# EAGLE board shd_v2.1_double 2 (EAGLE 9.5.2)
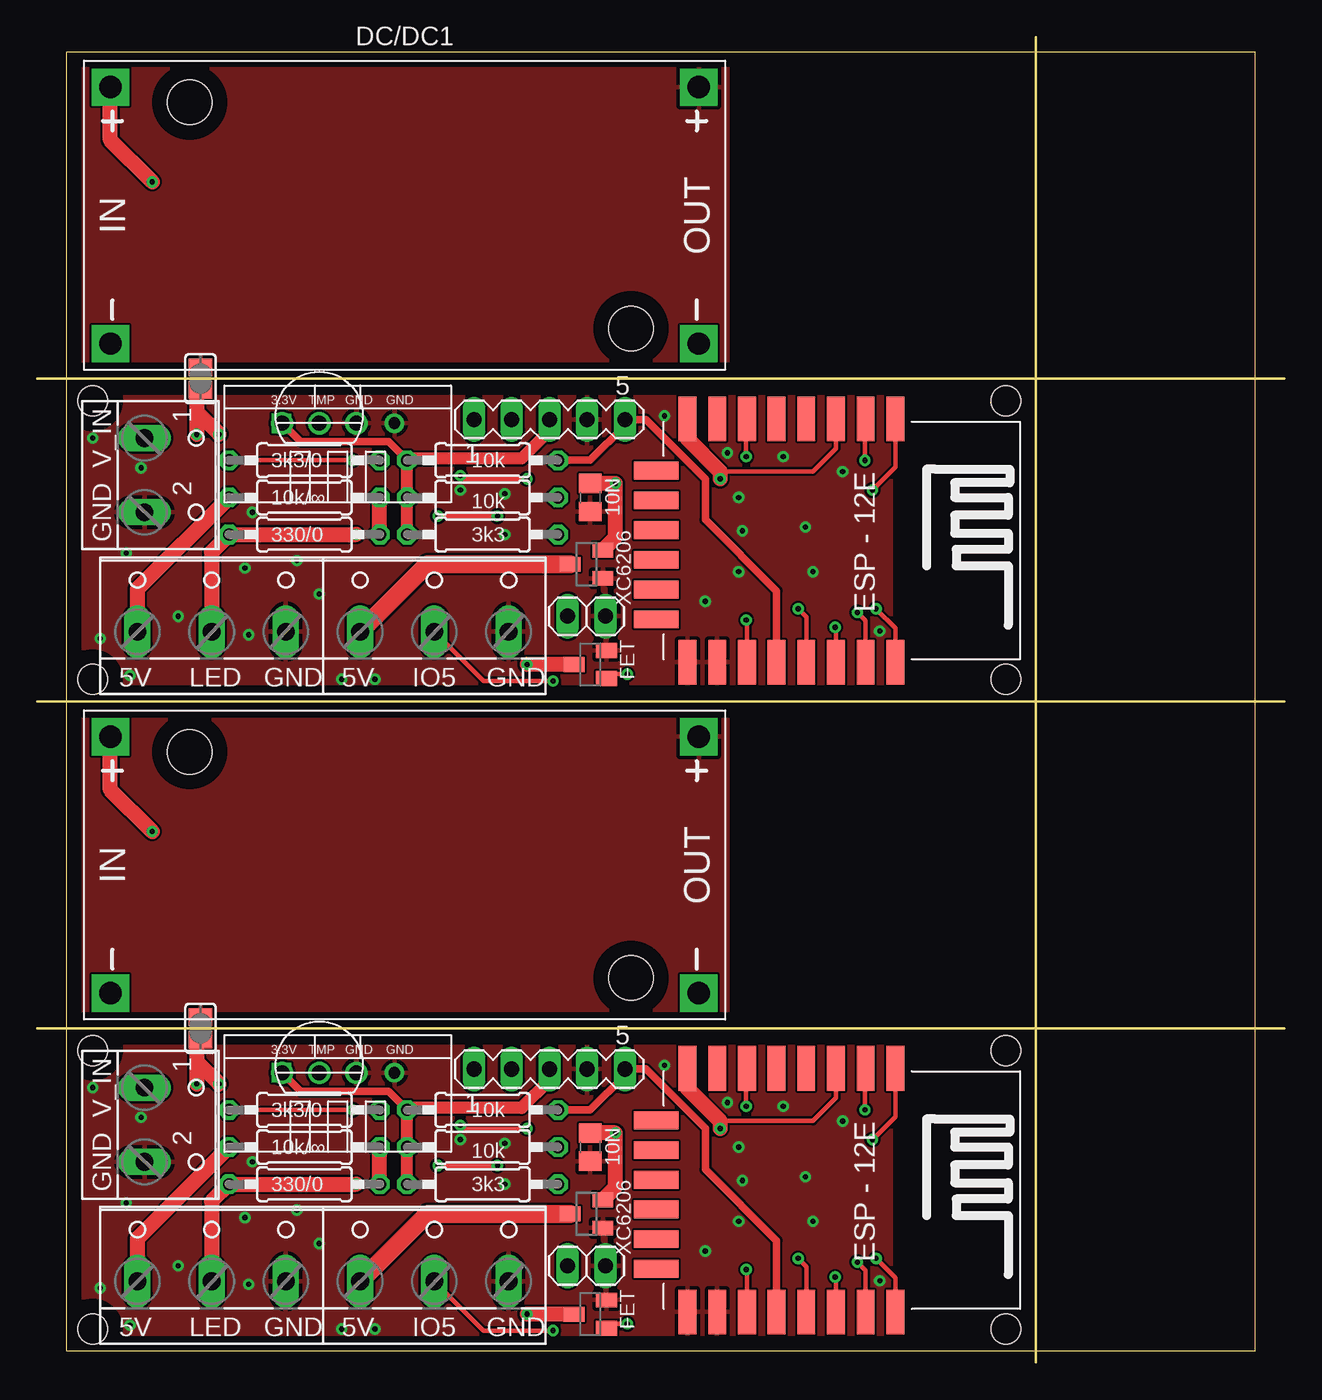
[diagram p0: board, top side]
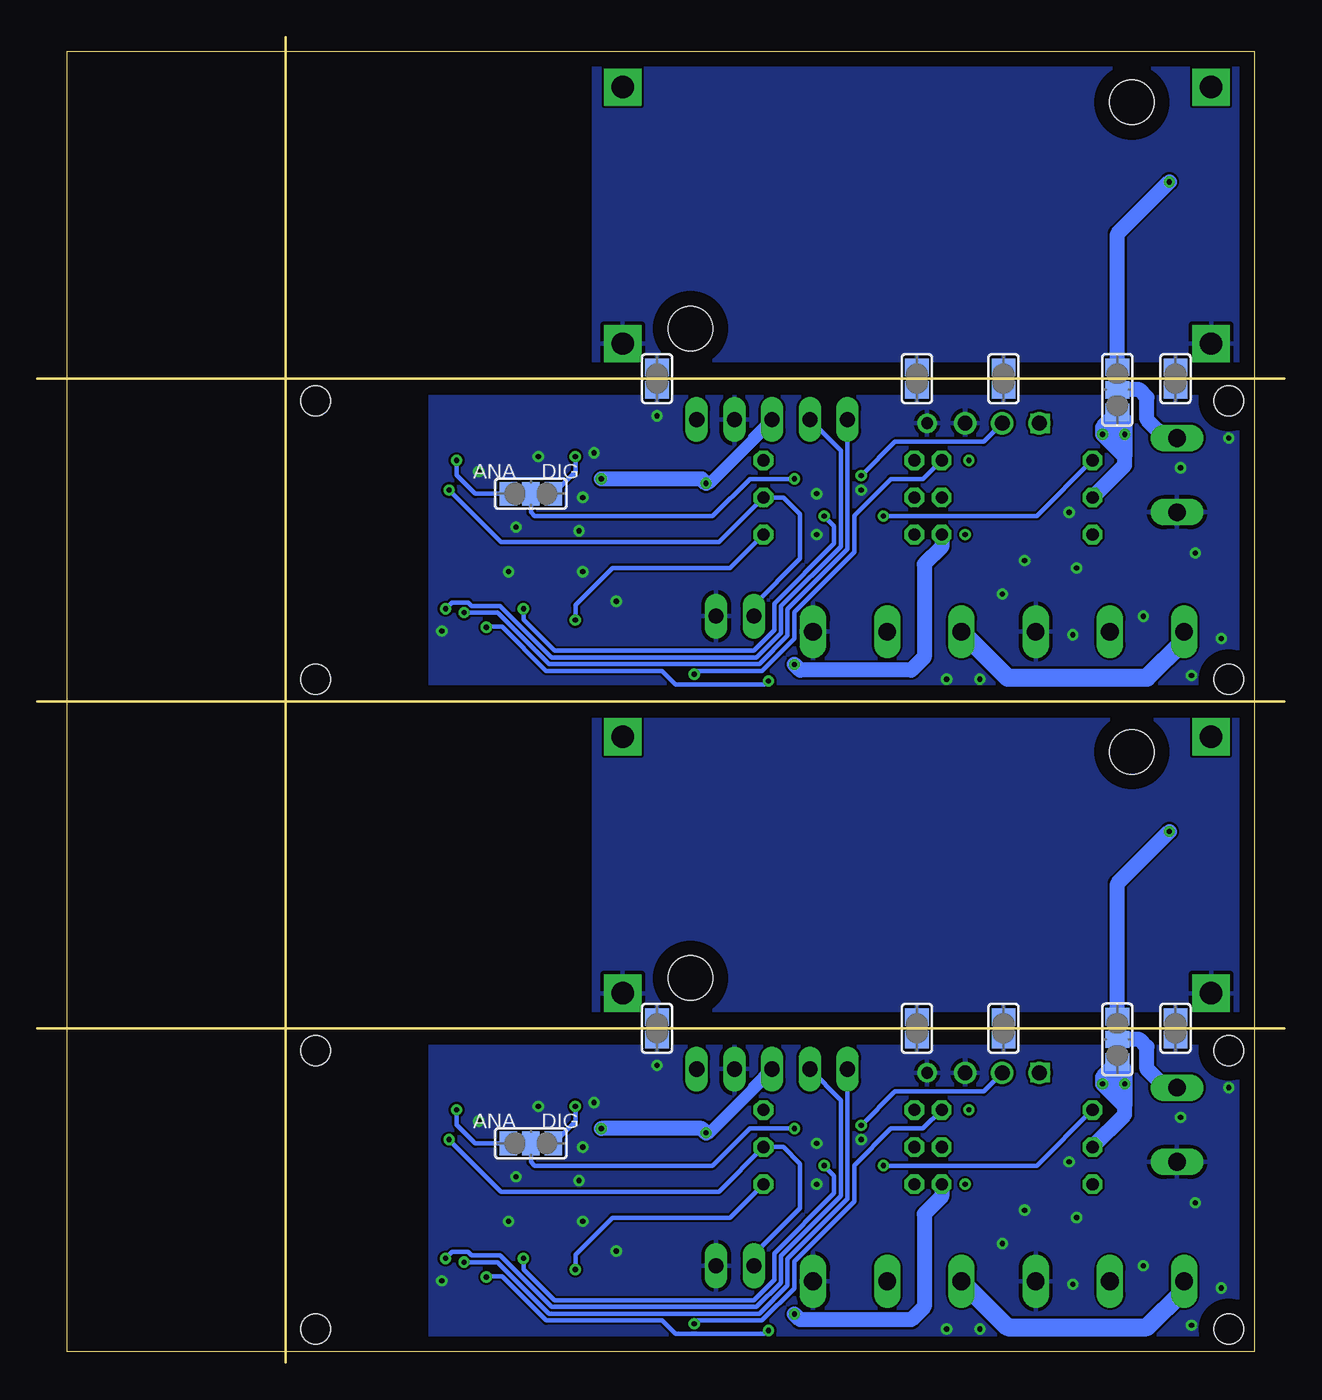
[diagram p1: board, bottom side, seen from below]

Size 84 x 89.25 mm. Coordinates in mm from the lower left corner, seen from the top.
Outline: 2,44.5 67.25,44.5
Outline: 0,66.25 84,66.25
Outline: 67.25,0 67.25,89.25
Outline: 0,44.5 84,44.5
Outline: 0,22.5 84,22.5
Outline: 2,0.75 2,88.25 82,88.25 82,0.75 2,0.75
Copper layers (1*16): Top 0.035mm / dielectric 1.5mm / Bottom 0.035mm
Design rules "default *": minimum track width 0.3mm, minimum drill 0.35mm, track to track 6mil, track to pad 6mil, pad to pad 6mil, via to via 6mil, smd to smd 6mil, copper to edge 40mil, drill to drill 6mil, minimum pad ring 10mil, minimum via ring 8mil, stop-mask expansion 4mil, vias tented up to drill 0mil, thermal gap 10mil
Holes 2 mm at 3.75,21 65.25,21 65.25,2.25 3.75,2.25 3.75,64.75 65.25,64.75 65.25,46 3.75,46

## Footprints (pad centres in the part's own frame; a part is rotated, then mirrored left to right if it is on the bottom)
W237-103 = drill 1.194 long: 1 -5,-1.29; 2 0,-1.29; 3 5,-1.29
C0805 = smd 1.3 x 1.5: 1 -0.95,0; 2 0.95,0
SOT23-BEC = smd 1 x 1.4: B -0.95,-1.1; C 0,1.1; E 0.95,-1.1
DC-DC-STEP-DOWN-LM2596 = drill 1.5 pad 2.5 square: IN+ -19.812,8.636; IN- -19.812,-8.636; OUT+ 19.812,8.636; OUT- 19.812,-8.636 | hole 3: -14.478,7.62; 15.24,-7.62
ESP12E-SMD = smd 3 x 1.2: ADC -8.3,3.8; CH_PD -8.3,1.8; GND 8.1,-8.2; GPIO0 8.1,-2.2; GPIO2 8.1,-4.2; GPIO4 8.1,-0.2; GPIO5 8.1,1.8; GPIO12 -8.3,-4.2; GPIO13 -8.3,-6.2; GPIO14 -8.3,-2.2; GPIO15 8.1,-6.2; GPIO16 -8.3,-0.2; RESET -8.3,5.8; RXD0 8.1,3.8; TXD0 8.1,5.8; VCC -8.3,-8.2 | smd 1.2 x 3: CS0 -4.8,-10.3; GPIO9 -0.8,-10.3; GPIO10 1.2,-10.3; MISO -2.8,-10.3; MOSI 3.2,-10.3; SCLK 5.2,-10.3
W237-102 = drill 1.194 long: 1 -2.5,-1.27; 2 2.5,-1.27
1X02 = drill 1.016 long: 1 -1.27,0; 2 1.27,0
MA05-1 = drill 1.016 long: 1 -5.08,0; 2 -2.54,0; 3 0,0; 4 2.54,0; 5 5.08,0
0207/10 = drill 0.813 octagon: 1 -5.08,0; 2 5.08,0
SJ_2 = smd 1.168 x 1.6: 1 -1.524,0; 2 0,0; 3 1.524,0
SJ = smd 1.168 x 1.6: 1 -0.762,0; 2 0.762,0
TO-92 = drill 1: 1 -2.5,0; 2 0,0; 3 2.5,0
TEMP-HUM-SENSOR-DHT22 = drill 0.8 square: 1 -3.81,0 | drill 0.8: 2 -1.27,0; 3 1.27,0; 4 3.81,0
SOT23 = smd 1 x 1.4: 1 -0.95,-1.1; 2 0.95,-1.1; 3 0,1.1

## Placement (x,y rotation side)
5V__LED__GND  [W237-103]  11.75,6.75 0 top
5V__LED__GND1  [W237-103]  11.75,50.5 0 top
5V__PIR__GND  [W237-103]  26.75,6.75 0 top
5V__PIR__GND1  [W237-103]  26.75,50.5 0 top
10N  [C0805]  37.25,14.5 270 top
10N1  [C0805]  37.25,58.25 270 top
BC1  [SOT23-BEC]  37.25,47 90 top
BC856  [SOT23-BEC]  37.25,3.25 90 top
DC/DC  DC-DC-STEP-DOWN-LM2596  [DC-DC-STEP-DOWN-LM2596]  24.75,33.5 0 top
DC/DC1  DC-DC-STEP-DOWN-LM2596  [DC-DC-STEP-DOWN-LM2596]  24.75,77.25 0 top
ESP-12E/F  [ESP12E-SMD]  52,11.5 270 top
ESP-12E/F1  [ESP12E-SMD]  52,55.25 270 top
GND__5V  [W237-102]  8.5,16 270 top
GND__5V1  [W237-102]  8.5,59.75 270 top
JP1  [1X02]  37,6.5 180 top
JP2  [1X02]  37,50.25 180 top
PROG_INTERFACE  [MA05-1]  34.5,19.75 0 top
PROG_INTERFACE1  [MA05-1]  34.5,63.5 0 top
R_GPIO1  3k3  [0207/10]  30,55.75 0 top
R_GPIO2  3k3  [0207/10]  30,12 0 top
R_LED_B  3k3  [0207/10]  18,17 180 top
R_LED_B1  3k3  [0207/10]  18,60.75 180 top
R_LED_C  10k  [0207/10]  18,14.5 180 top
R_LED_C1  330  [0207/10]  18,12 0 top
R_LED_C2  10k  [0207/10]  18,58.25 180 top
R_LED_C3  330  [0207/10]  18,55.75 0 top
R_PROG  10k  [0207/10]  30,17 180 top
R_PROG1  10k  [0207/10]  30,60.75 180 top
R_RST  10k  [0207/10]  30,14.5 180 top
R_RST1  10k  [0207/10]  30,58.25 180 top
SJ1  [SJ_2]  50.75,14.75 0 bottom
SJ2  [SJ_2]  11.25,21.75 90 bottom
SJ3  [SJ]  11,22.5 270 top
SJ4  [SJ]  42.25,22.5 90 bottom
SJ5  [SJ]  7.33,22.5 90 bottom
SJ6  [SJ]  18.92,22.5 90 bottom
SJ7  [SJ]  24.75,22.5 90 bottom
SJ8  [SJ_2]  50.75,58.5 0 bottom
SJ9  [SJ_2]  11.25,65.5 90 bottom
SJ10  [SJ]  11,66.25 270 top
SJ11  [SJ]  42.25,66.25 90 bottom
SJ12  [SJ]  7.33,66.25 90 bottom
SJ13  [SJ]  18.92,66.25 90 bottom
SJ14  [SJ]  24.75,66.25 90 bottom
TMP  TMP36  [TO-92]  19,19.5 0 top
TMP1  TMP36  [TO-92]  19,63.25 0 top
U$1  TEMP-HUM-SENSOR-DHT22  [TEMP-HUM-SENSOR-DHT22]  20.25,19.5 0 top
U$2  TEMP-HUM-SENSOR-DHT22  [TEMP-HUM-SENSOR-DHT22]  20.25,63.25 0 top
XC1  [SOT23]  37,53.75 90 top
XC6206  [SOT23]  37,10 90 top

## Library data of the parts
5V__LED__GND 5V__LED__GND1 5V__PIR__GND 5V__PIR__GND1 = con-wago-500; MPN: 237-103; OC_FARNELL: unknown; OC_NEWARK: 18M7116
10N 10N1 = eagle-ltspice; SPICEMODEL: NONE; SPICEPREFIX: C
BC1 BC856 = transistor
DC/DC DC/DC1 U$1 U$2 = diy-modules
ESP-12E/F ESP-12E/F1 = esp8266modules
GND__5V GND__5V1 = con-wago-500; MPN: 237-102; OC_FARNELL: unknown; OC_NEWARK: 70K9898
JP1 JP2 = pinhead
PROG_INTERFACE PROG_INTERFACE1 = con-lstb; OC_FARNELL: unknown; OC_NEWARK: unknown
R_GPIO1 R_GPIO2 R_LED_B R_LED_B1 R_LED_C R_LED_C1-R_LED_C3 R_PROG R_PROG1 R_RST R_RST1 = eagle-ltspice; SPICEMODEL: NONE; SPICEPREFIX: R
SJ1-SJ14 = jumper
TMP TMP1 = tmp36
XC1 XC6206 = Voltage Regulator

## Nets
GND: 5V__LED__GND.3 5V__PIR__GND.3 10N.2 BC856.E ESP-12E/F.GND ESP-12E/F.GPIO15 GND__5V.2 JP1.1 PROG_INTERFACE.4 SJ4.1 SJ5.1 SJ6.1 SJ7.1 TMP.3 U$1.3 U$1.4 XC6206.1
GND1: 5V__LED__GND1.3 5V__PIR__GND1.3 10N1.2 BC1.E ESP-12E/F1.GND ESP-12E/F1.GPIO15 GND__5V1.2 JP2.1 PROG_INTERFACE1.4 SJ11.1 SJ12.1 SJ13.1 SJ14.1 TMP1.3 U$2.3 U$2.4 XC1.1
GND_STEP_DOWN: DC/DC.IN- DC/DC.OUT- SJ4.2 SJ5.2 SJ6.2 SJ7.2
GND_STEP_DOWN1: DC/DC1.IN- DC/DC1.OUT- SJ11.2 SJ12.2 SJ13.2 SJ14.2
GPIO0: ESP-12E/F.GPIO0 PROG_INTERFACE.5 R_PROG.1
GPIO1: ESP-12E/F1.GPIO0 PROG_INTERFACE1.5 R_PROG1.1
LED_DATA_3.1: ESP-12E/F1.GPIO4 R_LED_B1.2
LED_DATA_3.3: ESP-12E/F.GPIO4 R_LED_B.2
LED_DATA_3.3_R: BC856.B R_LED_B.1
LED_DATA_3.3_R1: BC1.B R_LED_B1.1
LED_DATA_5.0: BC856.C R_LED_C1.2 R_LED_C.1
LED_DATA_5.1: BC1.C R_LED_C2.1 R_LED_C3.2
LED_DATA_OUT: 5V__LED__GND.2 R_LED_C1.1
LED_DATA_OUT1: 5V__LED__GND1.2 R_LED_C3.1
N$1: ESP-12E/F1.GPIO2 R_GPIO1.2
N$2: ESP-12E/F.GPIO2 R_GPIO2.2
PIR: 5V__PIR__GND.2 ESP-12E/F.GPIO5
PIR1: 5V__PIR__GND1.2 ESP-12E/F1.GPIO5
RST: ESP-12E/F.RESET JP1.2 R_RST.1
RST1: ESP-12E/F1.RESET JP2.2 R_RST1.1
RX: ESP-12E/F.RXD0 PROG_INTERFACE.1
RX1: ESP-12E/F1.RXD0 PROG_INTERFACE1.1
TMP_ANA: ESP-12E/F.ADC SJ1.1
TMP_ANA1: ESP-12E/F1.ADC SJ8.1
TMP_DATA: ESP-12E/F.GPIO12 SJ1.3
TMP_DATA1: ESP-12E/F1.GPIO12 SJ8.3
TX: ESP-12E/F.TXD0 PROG_INTERFACE.2
TX1: ESP-12E/F1.TXD0 PROG_INTERFACE1.2
V_IN: GND__5V.1 SJ2.2
V_IN1: GND__5V1.1 SJ9.2
V_IN_1: DC/DC.IN+ SJ2.3
V_IN_2: DC/DC1.IN+ SJ9.3
V_TMP: SJ1.2 TMP.2 U$1.2
V_TMP1: SJ8.2 TMP1.2 U$2.2
VCC_5.0: 5V__LED__GND.1 5V__PIR__GND.1 R_LED_C.2 SJ2.1 SJ3.2 XC6206.3
VCC_5.1: 5V__LED__GND1.1 5V__PIR__GND1.1 R_LED_C2.2 SJ9.1 SJ10.2 XC1.3
VCC_STEP_DOWN: DC/DC.OUT+ SJ3.1
VCC_STEP_DOWN1: DC/DC1.OUT+ SJ10.1
VDD_3.1: 10N1.1 ESP-12E/F1.CH_PD ESP-12E/F1.VCC PROG_INTERFACE1.3 R_GPIO1.1 R_PROG1.2 R_RST1.2 TMP1.1 U$2.1 XC1.2
VDD_3.3: 10N.1 ESP-12E/F.CH_PD ESP-12E/F.VCC PROG_INTERFACE.3 R_GPIO2.1 R_PROG.2 R_RST.2 TMP.1 U$1.1 XC6206.2

## Tracks (layer width: path | path; a pad name or v marks a point on that pad's centre or on a via)
GND  (via drill 0.35)
  other vias: 4.25,5 6.25,2.5 6,10.75 7,16.5 14,9.75 19,8 3.75,18.5 22.75,2.25 20.5,2.25 9.5,6.5 14.25,5.25 14.5,13.5 17.5,10.25 47.5,12.25 51.75,12.5 47.25,14.5 50.25,17.25 54.25,16.25 52.25,9.5 45,7.5 47.25,9.5 56.75,5.5 46.5,17.5 42.25,20 31.5,14.75 31.5,12 28.5,15
  pour Top: 1.25,22.25 1.25,1 57.5,1 57.5,22.25
  pour Bottom: 1.25,22.25 1.25,1 57.5,1 57.5,22.25
GND1  (via drill 0.35)
  other vias: 4.25,48.75 6.25,46.25 6,54.5 7,60.25 14,53.5 19,51.75 3.75,62.25 22.75,46 20.5,46 9.5,50.25 14.25,49 14.5,57.25 17.5,54 47.5,56 51.75,56.25 47.25,58.25 50.25,61 54.25,60 52.25,53.25 45,51.25 47.25,53.25 56.75,49.25 46.5,61.25 42.25,63.75 31.5,58.5 31.5,55.75 28.5,58.75
  pour Top: 1.25,66 1.25,44.75 57.5,44.75 57.5,66
  pour Bottom: 1.25,66 1.25,44.75 57.5,44.75 57.5,66
GND_STEP_DOWN
  pour Bottom: 1.25,22.75 1.25,44.25 46.5,44.25 46.5,22.75
GND_STEP_DOWN1
  pour Bottom: 1.25,66.5 1.25,88 46.5,88 46.5,66.5
GPIO0
  Top 0.5: R_PROG.1 37.25,17 39.58,19.33 PROG_INTERFACE.5 41,19.75 45,15.75 45,13 49.8,8.2 ESP-12E/F.GPIO0
GPIO1
  Top 0.5: R_PROG1.1 37.25,60.75 39.58,63.08 PROG_INTERFACE1.5 41,63.5 45,59.5 45,56.75 49.8,51.95 ESP-12E/F1.GPIO0
LED_DATA_3.1  (via drill 0.35)
  Top 0.3: ESP-12E/F1.GPIO4 51.8,50.2 v51.25,50.75 | v27,57 v31,57 | R_LED_B1.2 v21.25,60.75
  Bottom 0.3: v51.25,50.75 51.25,50.03 49.15,47.93 35.74,47.93 34.36,49.31 34.36,51.11 30.32,55.14 30.32,56.33 v31,57 | R_LED_B1.2 16.67,57 v27,57
LED_DATA_3.3  (via drill 0.35)
  Top 0.3: ESP-12E/F.GPIO4 51.8,6.45 v51.25,7 | v27,13.25 v31,13.25 | R_LED_B.2 v21.25,17
  Bottom 0.3: v51.25,7 51.25,6.28 49.15,4.18 35.74,4.18 34.36,5.56 34.36,7.36 30.32,11.39 30.32,12.57 v31,13.25 | R_LED_B.2 16.67,13.25 v27,13.25
LED_DATA_3.3_R  (via drill 0.35)
  Top 0.3: v39.75,2.6 38.65,2.6 BC856.B
  Bottom 0.3: R_LED_B.1 24.33,15.75 26.5,15.75 28.97,13.28 28.97,10.83 33,6.8 33,5 35.17,2.83 39.52,2.83 v39.75,2.6
LED_DATA_3.3_R1  (via drill 0.35)
  Top 0.3: v39.75,46.35 38.65,46.35 BC1.B
  Bottom 0.3: R_LED_B1.1 24.33,59.5 26.5,59.5 28.97,57.03 28.97,54.58 33,50.55 33,48.75 35.17,46.58 39.52,46.58 v39.75,46.35
LED_DATA_5.0  (via drill 0.35)
  Top 1: R_LED_C1.2 R_LED_C.1 | BC856.C v33,3.25
  Bottom 1: R_LED_C1.2 23.08,11.17 24.25,10 24.25,3.75 25.12,2.88 32.62,2.88 v33,3.25
LED_DATA_5.1  (via drill 0.35)
  Top 1: R_LED_C3.2 R_LED_C2.1 | BC1.C v33,47
  Bottom 1: R_LED_C3.2 23.08,54.92 24.25,53.75 24.25,47.5 25.12,46.62 32.62,46.62 v33,47
LED_DATA_OUT  (via drill 0.35)
  Top 1: 5V__LED__GND.2 11.75,10.83 R_LED_C1.1 v21.5,12
LED_DATA_OUT1  (via drill 0.35)
  Top 1: 5V__LED__GND1.2 11.75,54.58 R_LED_C3.1 v21.5,55.75
N$1  (via drill 0.35)
  Top 0.3: v47.75,50 47.8,49.95 ESP-12E/F1.GPIO2
  Bottom 0.3: R_GPIO1.2 37.33,53.5 45.25,53.5 47.75,51 v47.75,50
N$2  (via drill 0.35)
  Top 0.3: v47.75,6.25 47.8,6.2 ESP-12E/F.GPIO2
  Bottom 0.3: R_GPIO2.2 37.33,9.75 45.25,9.75 47.75,7.25 v47.75,6.25
PIR  (via drill 0.35)
  Top 0.3: 5V__PIR__GND.2 30.07,2.14 v34.75,2.14 | v53.75,5.75 53.8,5.7 ESP-12E/F.GPIO5
  Bottom 0.3: v34.75,2.14 34.77,2.14 35,1.92 41,1.92 41.91,2.83 49.72,2.83 52.7,5.8 53.7,5.8 v53.75,5.75
PIR1  (via drill 0.35)
  Top 0.3: 5V__PIR__GND1.2 30.07,45.89 v34.75,45.89 | v53.75,49.5 53.8,49.45 ESP-12E/F1.GPIO5
  Bottom 0.3: v34.75,45.89 34.77,45.89 35,45.67 41,45.67 41.91,46.58 49.72,46.58 52.7,49.55 53.7,49.55 v53.75,49.5
RST  (via drill 0.35)
  Top 0.3: ESP-12E/F.RESET 57.8,16.55 v56.25,15
  Bottom 0.3: v56.25,15 52.75,11.5 38.08,11.5 R_RST.1 33.75,14.5 32.62,13.38 32.62,10.38 35.73,7.27 JP1.2
RST1  (via drill 0.35)
  Top 0.3: ESP-12E/F1.RESET 57.8,60.3 v56.25,58.75
  Bottom 0.3: v56.25,58.75 52.75,55.25 38.08,55.25 R_RST1.1 33.75,58.25 32.62,57.12 32.62,54.12 35.73,51.02 JP2.2
RX  (via drill 0.35)
  Top 0.3: v55.25,6.75 55.8,6.2 ESP-12E/F.RXD0
  Bottom 0.3: v55.25,6.75 53,6.75 49.53,3.28 35.36,3.28 33.45,5.19 33.45,6.99 29.42,11.02 PROG_INTERFACE.1
RX1  (via drill 0.35)
  Top 0.3: v55.25,50.5 55.8,49.95 ESP-12E/F1.RXD0
  Bottom 0.3: v55.25,50.5 53,50.5 49.53,47.03 35.36,47.03 33.45,48.94 33.45,50.74 29.42,54.77 PROG_INTERFACE1.1
TMP_ANA  (via drill 0.35)
  Top 0.3: v55.75,17 55.75,19.75 ESP-12E/F.ADC
  Bottom 0.3: SJ1.1 54.5,14.75 55.75,16 v55.75,17
TMP_ANA1  (via drill 0.35)
  Top 0.3: v55.75,60.75 55.75,63.5 ESP-12E/F1.ADC
  Bottom 0.3: SJ8.1 54.5,58.5 55.75,59.75 v55.75,60.75
TMP_DATA  (via drill 0.35)
  Top 0.3: v47.75,17.25 47.75,19.75 ESP-12E/F.GPIO12
  Bottom 0.3: SJ1.3 47.75,16.23 v47.75,17.25
TMP_DATA1  (via drill 0.35)
  Top 0.3: v47.75,61 47.75,63.5 ESP-12E/F1.GPIO12
  Bottom 0.3: SJ8.3 47.75,59.98 v47.75,61
TX  (via drill 0.35)
  Top 0.3: v56.5,7 57.8,5.7 ESP-12E/F.TXD0
  Bottom 0.3: v56.5,7 56.07,7.43 54.97,7.43 54.74,7.2 52.81,7.2 49.34,3.73 35.55,3.73 33.91,5.38 33.91,7.17 29.87,11.21 29.87,17.66 PROG_INTERFACE.2
TX1  (via drill 0.35)
  Top 0.3: v56.5,50.75 57.8,49.45 ESP-12E/F1.TXD0
  Bottom 0.3: v56.5,50.75 56.07,51.18 54.97,51.18 54.74,50.95 52.81,50.95 49.34,47.48 35.55,47.48 33.91,49.12 33.91,50.92 29.87,54.96 29.87,61.41 PROG_INTERFACE1.2
V_IN
  Bottom 1: GND__5V.1 8,18.5 9.25,19.75 9.25,21.25 9.75,21.75 SJ2.2
V_IN1
  Bottom 1: GND__5V1.1 8,62.25 9.25,63.5 9.25,65 9.75,65.5 SJ9.2
V_IN_1  (via drill 0.35)
  Top 1: v7.75,35.75 4.94,38.56 DC/DC.IN+
  Bottom 1: SJ2.3 11.25,32.25 v7.75,35.75
V_IN_2  (via drill 0.35)
  Top 1: v7.75,79.5 4.94,82.31 DC/DC1.IN+
  Bottom 1: SJ9.3 11.25,76 v7.75,79.5
V_TMP  (via drill 0.35)
  Top 0.3: v33,15.75 32.97,15.72 28.75,15.72 v28.5,15.97
  Bottom 0.3: SJ1.2 50.75,13.5 50.5,13.25 38.5,13.25 36,15.75 v33,15.75 | v28.5,15.97 26.22,18.25 20.25,18.25 TMP.2 U$1.2
V_TMP1  (via drill 0.35)
  Top 0.3: v33,59.5 32.97,59.47 28.75,59.47 v28.5,59.72
  Bottom 0.3: SJ8.2 50.75,57.25 50.5,57 38.5,57 36,59.5 v33,59.5 | v28.5,59.72 26.22,62 20.25,62 TMP1.2 U$2.2
VCC_5.0  (via drill 0.35)
  Top 1: SJ3.2 10.75,21.49 10.75,20.25 | 10.75,20.25 v10.75,18.75 | v12.25,18.75 10.75,20.25 | R_LED_C.2 6.75,8.33 5V__LED__GND.1
  Top 1.2: 5V__PIR__GND.1 26.29,10 XC6206.3
  Bottom 1: v12.25,18.75 12.25,19.23 SJ2.1 10.75,19.73 v10.75,18.75 | v10.75,18.75 10.75,17.25 | v10.75,18.75 v12.25,18.75 | v12.25,18.75 10.75,17.25 | R_LED_C.2 10.75,16.67 10.75,17.25
  Bottom 1.2: 5V__PIR__GND.1 18.66,2.37 9.25,2.37 6.75,4.87 5V__LED__GND.1
VCC_5.1  (via drill 0.35)
  Top 1: SJ10.2 10.75,65.24 10.75,64 | 10.75,64 v10.75,62.5 | v12.25,62.5 10.75,64 | R_LED_C2.2 6.75,52.08 5V__LED__GND1.1
  Top 1.2: 5V__PIR__GND1.1 26.29,53.75 XC1.3
  Bottom 1: v12.25,62.5 12.25,62.98 SJ9.1 10.75,63.48 v10.75,62.5 | v10.75,62.5 10.75,61 | v10.75,62.5 v12.25,62.5 | v12.25,62.5 10.75,61 | R_LED_C2.2 10.75,60.42 10.75,61
  Bottom 1.2: 5V__PIR__GND1.1 18.66,46.12 9.25,46.12 6.75,48.62 5V__LED__GND1.1
VCC_STEP_DOWN
  pour Top: 1.25,22.75 1.25,44.25 46.5,44.25 46.5,22.75
VCC_STEP_DOWN1
  pour Top: 1.25,66.5 1.25,88 46.5,88 46.5,66.5
VDD_3.1  (via drill 0.35)
  Top 0.3: ESP-12E/F1.CH_PD 53.8,61.55 52.25,60 46,60 | TMP1.1 U$2.1
  Top 0.5: R_GPIO1.1 R_RST1.2 R_PROG1.2 23.67,62 17.75,62 TMP1.1
  Top 0.8: PROG_INTERFACE1.3 34.5,62.75 32.62,60.88 25.05,60.88 R_PROG1.2 R_GPIO1.1
  Top 1: ESP-12E/F1.VCC 43.8,62.2 46,60 v46,59.5 | 10N1.1 v38.95,59.2 38.95,55.55 XC1.2
  Bottom 0.8: 35.73,62.19 35.73,62.27 PROG_INTERFACE1.3 34.5,63.42 35.73,62.19 | v38.95,59.2 38.72,59.2 35.73,62.19
  Bottom 1: v46,59.5 39.25,59.5 v38.95,59.2
VDD_3.3  (via drill 0.35)
  Top 0.3: ESP-12E/F.CH_PD 53.8,17.8 52.25,16.25 46,16.25 | TMP.1 U$1.1
  Top 0.5: R_GPIO2.1 R_RST.2 R_PROG.2 23.67,18.25 17.75,18.25 TMP.1
  Top 0.8: PROG_INTERFACE.3 34.5,19 32.62,17.12 25.05,17.12 R_PROG.2 R_GPIO2.1
  Top 1: ESP-12E/F.VCC 43.8,18.45 46,16.25 v46,15.75 | 10N.1 v38.95,15.45 38.95,11.8 XC6206.2
  Bottom 0.8: 35.73,18.44 35.73,18.52 PROG_INTERFACE.3 34.5,19.67 35.73,18.44 | v38.95,15.45 38.72,15.45 35.73,18.44
  Bottom 1: v46,15.75 39.25,15.75 v38.95,15.45

## Text on the board
tNames: 3.3V | TMP | GND | GND | V_IN | 3k3/0 | 10k | 10k/∞ | 10k | 10N | GND | 330/0 | 3k3 | XC6206 | 5V | LED | GND | 5V | IO5 | GND | FET | 3.3V | TMP | GND | GND | V_IN | 3k3/0 | 10k | 10k/∞ | 10k | 10N | GND | 330/0 | 3k3 | XC6206 | FET | 5V | LED | GND | 5V | IO5 | GND
bNames: DIG | ANA | DIG | ANA